# Altium PCB indicator.PcbDoc
Units mm, origin at the board's own origin, x right, y up, seen from the top; angles counter-clockwise.
Board outline 152.4 x 101.6 mm, 2 copper layers (Top Layer, Bottom Layer); 23 components, 34 nets, 114 pads, 0 vias.
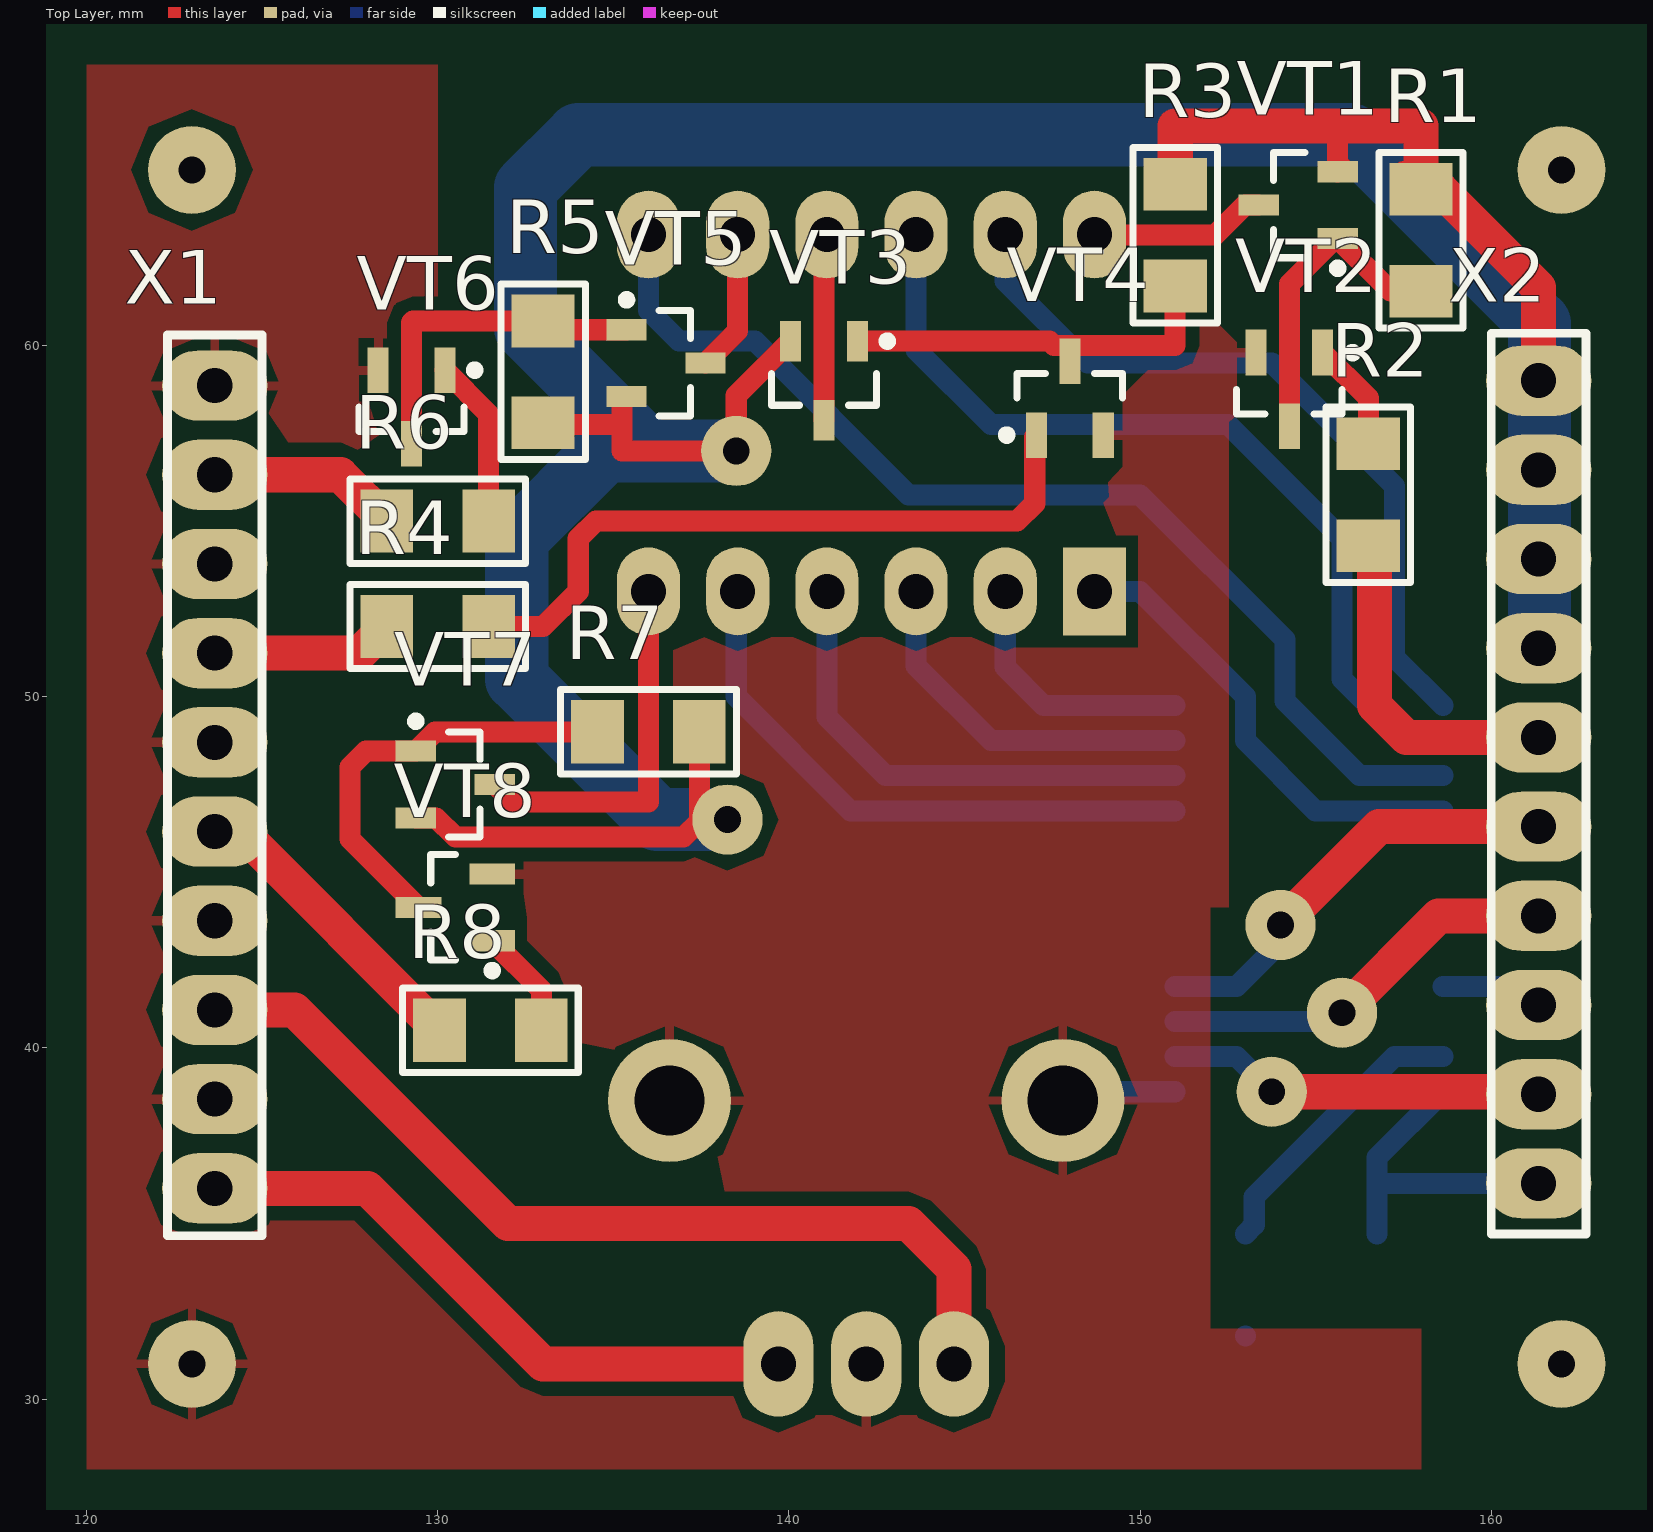
[diagram p0: Top Layer view]
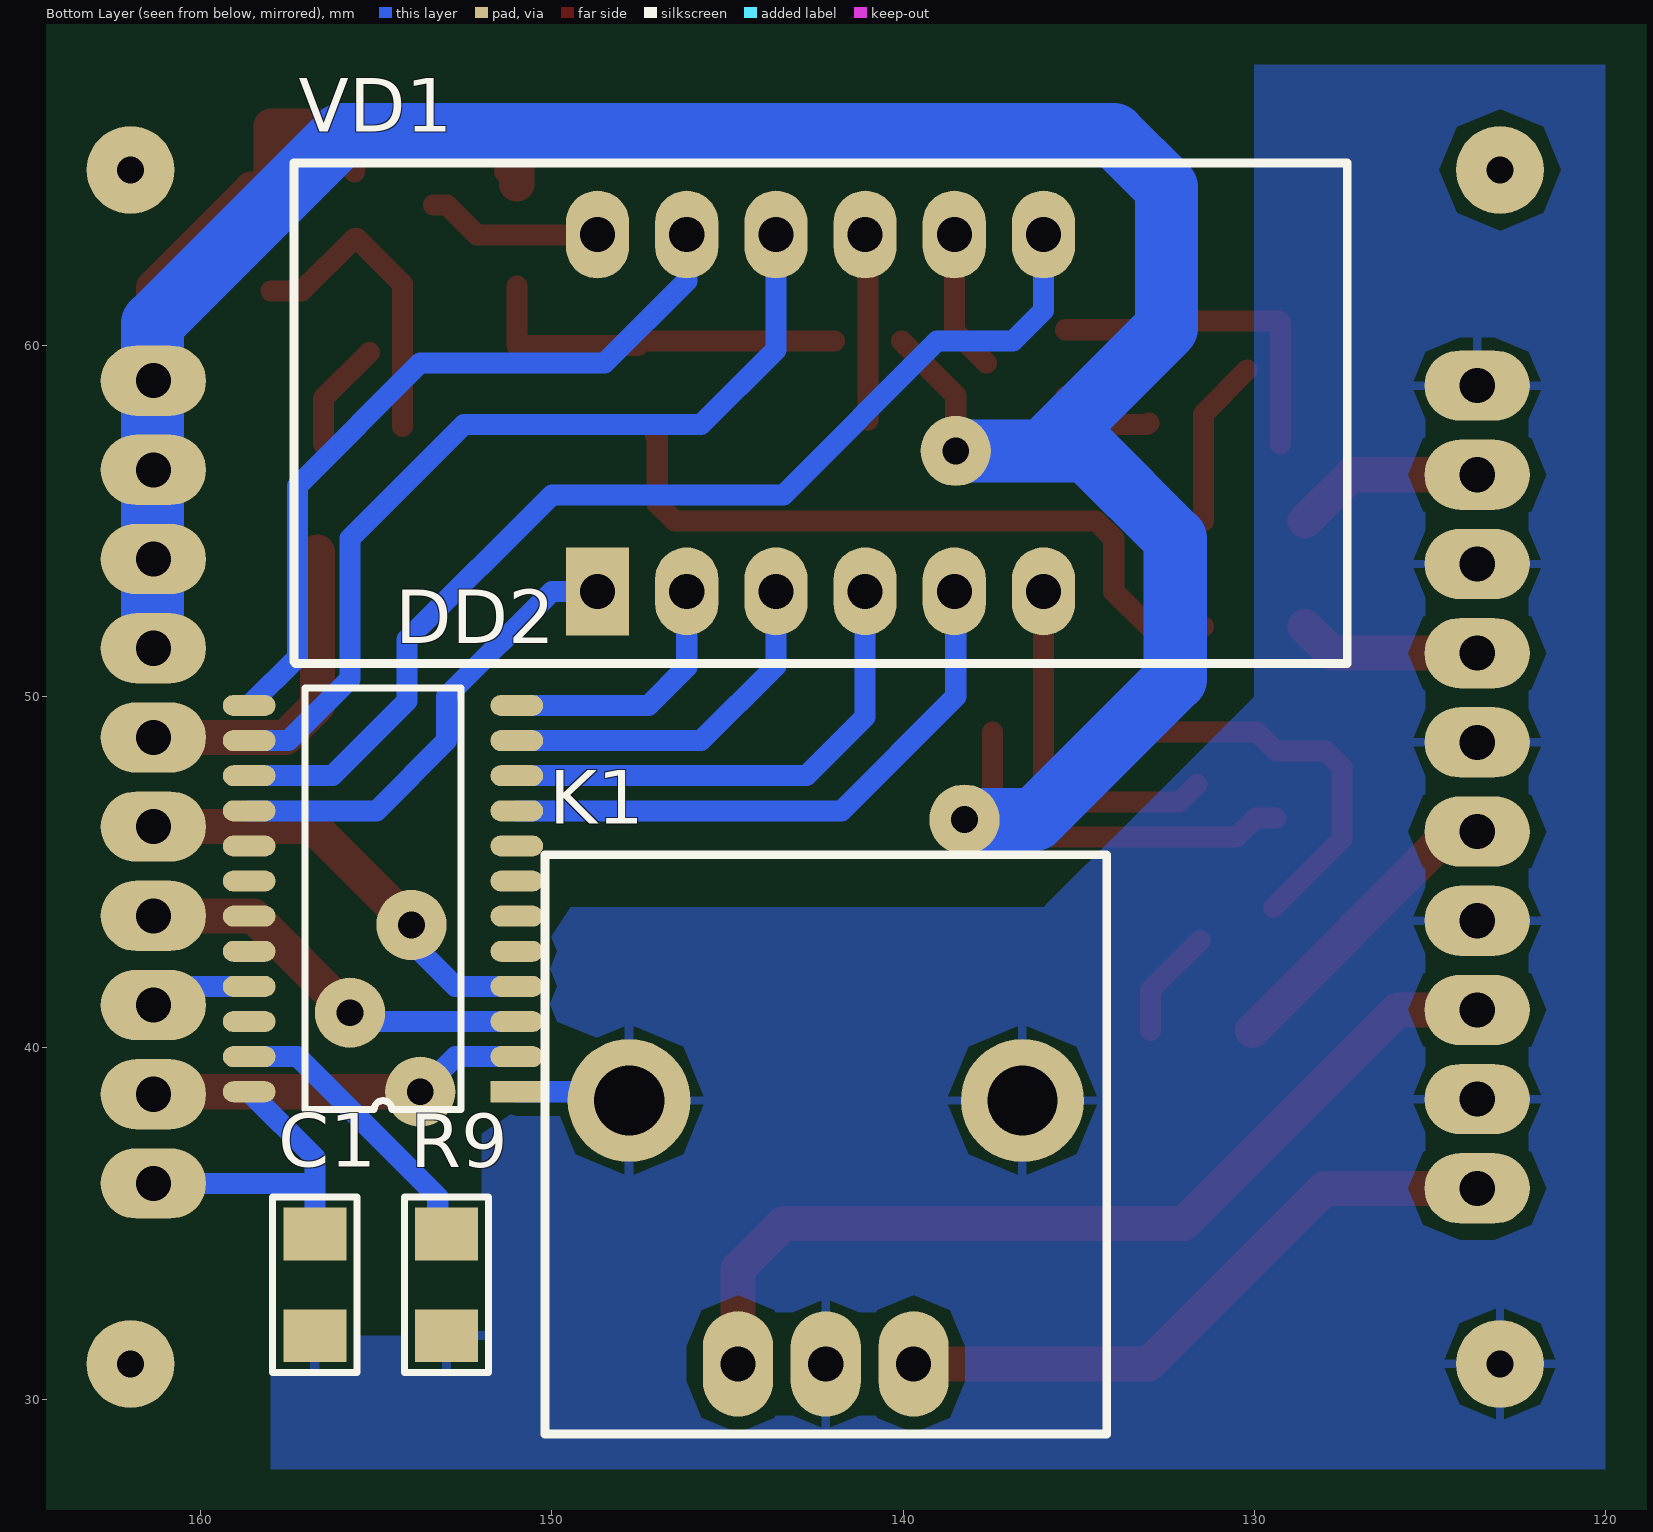
[diagram p1: Bottom Layer view, seen from below]

## Layer stack, top to bottom
Top Solder: solder mask 0.0102, Solder Resist, Dk 3.5
Top Layer: signal copper 0.0356
Dielectric 1: dielectric 0.32, FR-4, Dk 4.8
Bottom Layer: signal copper 0.0356
Bottom Solder: solder mask 0.0102, Solder Resist, Dk 3.5

## Board outline
25.4,25.4 177.8,25.4 177.8,127 25.4,127

## Design rules (kind name [scope] priority, off if disabled: settings)
Clearance [All] p1: gap=0.35
PolygonConnect [All] p1: connectstyle=Relief reliefconductorwidth=0.254 reliefentries=4 polygonreliefangle="90 Angle" airgapwidth=0.254
RoomDefinition indicator [InComponentClass('indicator')] p1: confinementstyle=ConfineIn formatcopy=TRUE lockcomponents=FALSE outline 165,28 165,68 120,68 120,28
RoutingVias [All] p1: holewidth=0.711 width=1.27 viastyle="Through Hole" minholewidth=0.711 minwidth=1.27 maxholewidth=0.711 maxwidth=1.27
SolderMaskExpansion [All] p1: expansion=0.102
Width [All] p1: maxlimit=11 minlimit=0.254 preferedwidth=0.254
29 further rules are at their usual default settings.

## Components (designator, comment, footprint, x,y, rotation, side; value= is the part's Value field where it differs from the comment)
C1 "0.1 uF" R1206 156.75,33.25 r270 bottom
DD2 "MBI5026CF" SOP24 151,38.75 r0 bottom
K1 "EC12" EC12E1220406 144.7,31 r90 bottom
R1 "1K" R1206 158,63 r90 top
R2 "1K" R1206 156.5,55.75 r270 top
R3 "1K" R1206 151,63.146 r90 top
R4 "1K" R1206 130,52 r180 top
R5 "1K" R1206 133,59.25 r270 top
R6 "1K" R1206 130,55 r180 top
R7 "1K" R1206 136,49 r0 top
R8 "1K" R1206 131.5,40.5 r180 top
R9 "4.7K" R1206 153,33.25 r90 bottom
VD1 "3461BS" 3461bs 148.7,53 r90 bottom
VT1 "IRLML6302" SOT-23_N 154.5,64 r180 top
VT2 "BC847" SOT23_N 154.25,58.75 r270 top
VT3 "IRLML6302" SOT-23_N 141,59 r270 top
VT4 "BC847" SOT23_N 148,58.5 r90 top
VT5 "IRLML6302" SOT-23_N 136.5,59.5 r0 top
VT6 "BC847" SOT23_N 129.25,58.25 r270 top
VT7 "IRLML6302" SOT-23_N 130.5,47.5 r0 top
VT8 "BC847" SOT23_N 130.5,44 r180 top
X1 "PBS-10" PBS-10 125,36 r180 top
X2 "PBS-10" PBS-10 160,59 r0 top

## Footprints (in the part's own frame and the unit in brackets; to place one, negate y for a bottom-side part, rotate by r counter-clockwise, add the part's x,y. Pads: shape width x height; smd on the part's side, far side on the other; paste and mask are expansions set on the pad)
3461bs [mm]
  rect 2.5x1.8 hole 1: 1(0,0)
  oval 2.5x1.8 hole 1: 2(0,-2.54) 3(0,-5.08) 4(0,-7.62) 5(0,-10.16) 6(0,-12.7) 7(10.16,-12.7) 8(10.16,-10.16) 9(10.16,-7.62) 10(10.16,-5.08) 11(10.16,-2.54) 12(10.16,0)
  silkscreen extent -2.05,-21.35 12.2,8.65, body extent -1.9,-21.45 12.1,8.55, height 7.2
EC12E1220406 [mm]
  oval 3x2 hole 1: 1(0,0) 2(0,-2.5) 3(0,-5)
  round 3.5 hole 2: 2(7.5,-8.1) 5(7.5,3.1)
  silkscreen extent -2,-10.5 14.5,5.5, body extent -0.15,-9.5 14.1,4.5, height 20.2
PBS-10 [mm]
  oval 3x2 hole 1: 1(1.35,0) 2(1.35,-2.54) 3(1.35,-5.08) 4(1.35,-7.62) 5(1.35,-10.16) 6(1.35,-12.7) 7(1.35,-15.24) 8(1.35,-17.78) 9(1.35,-20.32) 10(1.35,-22.86)
  silkscreen extent 0,-24.3 2.7,1.35, body extent 0,-24.3 2.7,1.35, height 12
R1206 [mm]
  rect 1.5x1.8 smd: 1(-1.45,0) 2(1.45,0)
  silkscreen extent -2.5,-1.2 2.5,1.2, body extent -1.6,-0.85 1.6,0.85, height 0.6
SOP24 [mm]
  rect 1.5x0.6 smd: 1(0,0)
  oval 1.5x0.6 smd: 2(0,-1) 3(0,-2) 4(0,-3) 5(0,-4) 6(0,-5) 7(0,-6) 8(0,-7) 9(0,-8) 10(0,-9) 11(0,-10) 12(0,-11) 13(7.62,-11) 14(7.62,-10) 15(7.62,-9) 16(7.62,-8) 17(7.62,-7) 18(7.62,-6) 19(7.62,-5) 20(7.62,-4) 21(7.62,-3) 22(7.62,-2) 23(7.62,-1) 24(7.62,0)
  silkscreen extent 1.59,-11.5 6.03,0.5, body extent 0.75,-12 6.85,1, height 1.9
SOT23_N [mm] "SOT23, 3-Leads, Body 2.9x1.3mm, Pitch 0.95mm, Lead Span 2.3mm, IPC Medium Density"
  rect 1.3x0.6 smd: 1(-1.05,0.95) 2(-1.05,-0.95) 3(1.05,0)
  silkscreen extent -1.17,-1.5 0.7,1.93, body extent -0.7,-1.5 0.7,1.5, height 1.1
SOT-23_N [mm] "SOT23, 3-Leads, Body 2.9x1.3mm, Pitch 0.95mm, Lead Span 2.3mm, IPC Medium Density"
  rect 1.15x0.6 smd: 1(-1.125,0.95) 2(-1.125,-0.95) 3(1.125,0)
  silkscreen extent -1.25,-1.5 0.7,1.92, body extent -0.7,-1.5 0.7,1.5, height 1.11

## Part data
C1: library part CAP_1206
K1: library part EC12E1220406
R1 R2 R3 R4 R5 R6 R7 R8 R9: library part Res
VT1 VT3 VT5 VT7: "HEXFET Power MOSFET"
VT2 VT4 VT6 VT8: "NPN General-purpose Transistor"

## Free pads (board coordinates)
  round 2 hole 0.762: 0(138.5,57) 1(138.25,46.5) 3(155.75,41) 5(153.75,38.75) 6(154,43.5)
  round 2.5 hole 0.762: 3(123,31) 3(123,65) 3(162,31) 3(162,65)

## Nets (pads, with @x,y where several pads share a name; then routed paths per layer and width w, separated by ;. In a path a pad name is that pad's centre, name@x,y a point inside that pad or via, vN(x,y) a via of type N, cw(c..) or ccw(c..) an arc to the next point about the centre after c; other vN are vias at no path point)
5V: C1.1 DD2.24 X2.10 | length 9.5
  Bottom Layer w0.6: C1.1 156.75,36 ; DD2.24 156.75,36.88 156.75,36 ; X2.10 156.89,36.14 156.75,36
12V: pad.0 pad.1 R1.2 R3.2 R5.2 R7.2 VT1.2 VT3.2 VT5.2 VT7.2 X2.1 X2.2 X2.3 X2.4 | length 111
  Top Layer w0.6: VT7.2 129.95,46.55 130.5,46 137,46 137.45,46.45 R7.2 ; R5.2 133.05,57.75 135.25,57.75 ; VT5.2 135.25,58.425 135.25,57.75 ; VT3.2 138.5,58.575 pad.0 135.25,57 135.25,57.75 ; R3.2 R3.2@151.354,64.95 ; 155.625,66.125 VT1.2 VT1.2@155.75,65.075 ; R1.2@157.5,64.95 R1.2
  Top Layer w1: R3.2 151,66.25 158,66.25 R1.2 158.55,64.45 161.35,61.65 X2.1
  Bottom Layer w1.8: pad.1 136.25,46.5 132.25,50.5 132.25,54.5 134.75,57 136,57 ; pad.0 136,57 ; X2.4 161.37,51.38 161.37,60.63 ; 161.35,60.65 156,66 134,66 132.5,64.5 132.5,60.5 136,57
A: DD2.13 VD1.11 | length 21.6
  Bottom Layer w0.6: VD1.11 146.16,61.84 148.5,59.5 153.75,59.5 157.25,56 157.25,51.12 DD2.13
A1: VD1.12 VT1.3 | length 5
  Top Layer w0.6: VD1.12 148.714,63.146 152.129,63.146 152.983,64 VT1.3
A2: VD1.9 VT3.3 | length 5.2
  Top Layer w0.6: VT3.3 VD1.9@141,63.08
A3: VD1.8 VT5.3 | length 4
  Top Layer w0.6: VT5.3 138.54,60.415 VD1.8
A4: VD1.6 VT7.3 | length 11.7
  Top Layer w0.6: VT7.3 132.125,47 136,47 VD1.6 VD1.6@136,51.875
B: DD2.15 VD1.7 | length 31.3
  Bottom Layer w0.6: VD1.7 136,61 136.875,60.125 139.035,60.125 143.41,55.75 150,55.75 154.125,51.625 154.125,49.875 156.25,47.75 DD2.15
C: DD2.10 VD1.4 | length 14.2
  Bottom Layer w0.6: VD1.4 141.08,49.42 142.75,47.75 DD2.10
CLK: DD2.3 pad.3@155.75,41 X2.7 | length 11.6
  Top Layer w0.6: X2.7@161.34,43.75 X2.7
  Top Layer w1: pad.3@155.75,41 158.5,43.75 X2.7@161.34,43.75
  Bottom Layer w0.6: DD2.3 155.5,40.75 pad.3@155.75,41
D: DD2.12 VD1.2 | length 7.5
  Bottom Layer w0.6: VD1.2 146.16,50.84 147.25,49.75 DD2.12
E: DD2.16 VD1.1 | length 13.2
  Bottom Layer w0.6: VD1.1 150,53 153,50 153,48.75 155,46.75 DD2.16
ENC_A: K1.1 X1.3 | length 26.8
  Top Layer w1: X1.3 125.92,41.08 132,35 143.4,35 144.7,33.7 K1.1
ENC_B: K1.3 X1.1 | length 18.1
  Top Layer w1: X1.1 128,36 133,31 K1.3
F: DD2.14 VD1.10 | length 25.2
  Bottom Layer w0.6: VD1.10 143.62,59.88 145.75,57.75 152.5,57.75 155.75,54.5 155.75,50.5 157.5,48.75 DD2.14
G: DD2.9 VD1.5 | length 16.8
  Bottom Layer w0.6: VD1.5@138.5,52.96 138.5,50 141.75,46.75 DD2.9
GND: C1.2 DD2.1 K1.2 K1.5 pad.3@123,31 R9.1 VT2.2 VT4.2 VT6.2 VT8.2 X1.2 X1.4 X1.6 X1.8 X1.10 | length 4.1
  Top Layer w0.6: X1.10 X1.10@124.09,59.3
  Bottom Layer w0.6: X1.2 X1.2@123.69,38.5 ; K1.5 148.05,38.75 DD2.1
  Bottom Layer w1: K1.5@147.75,38.45 K1.5
H: DD2.11 VD1.3 | length 10.4
  Bottom Layer w0.6: VD1.3 143.62,50.88 145.75,48.75 DD2.11
LE: DD2.4 pad.6 X2.6 | length 12.5
  Top Layer w1: pad.6 156.8,46.3 X2.6
  Bottom Layer w0.6: DD2.4 152.75,41.75 154,43 pad.6
NetDD2_23: DD2.23 R9.2 | length 8.2
  Bottom Layer w0.6: R9.2 153.25,34.95 153.25,35.75 157.25,39.75 DD2.23
NetR1_1: R1.1 VT1.1 VT2.3 | length 9
  Top Layer w0.6: VT2.3 154.25,61.75 155.55,63.05 VT1.1 157.125,61.55 R1.1
NetR2_1: R2.1 VT2.1 | length 3.1
  Top Layer w0.6: VT2.1 156.5,58.5 R2.1
NetR3_1: R3.1 VT3.1 VT4.3 | length 10.8
  Top Layer w0.6: VT3.1 147.425,60.125 147.55,60 151,60 R3.1
NetR4_1: R4.1 VT4.1 | length 19.8
  Top Layer w0.6: R4.1 133,52 134,53 134,54.5 134.5,55 146.5,55 147,55.5 147,57.4 VT4.1
NetR5_1: R5.1 VT5.1 VT6.3 | length 9.6
  Top Layer w0.6: VT6.3 129.25,60.65 ; 129.3,60.7 R5.1 133.25,60.45 VT5.1
NetR6_1: R6.1 VT6.1 | length 4.8
  Top Layer w0.6: VT6.1 131.45,58.05 R6.1
NetR7_1: R7.1 VT7.1 VT8.3 | length 12.3
  Top Layer w0.6: VT8.3 127.5,45.95 127.5,48 127.95,48.45 VT7.1 129.925,49 R7.1
NetR8_1: R8.1 VT8.1 | length 3.1
  Top Layer w0.6: VT8.1 132.95,41.65 R8.1
OE: DD2.21 X2.8 | length 2.9
  Bottom Layer w0.6: DD2.21 160.82,41.75 X2.8
R1: R2.2 X2.5 | length 9.5
  Top Layer w0.6: X2.5@161.26,48.75 X2.5
  Top Layer w1: R2.2@156.68,54.12 156.68,49.75 157.59,48.84 X2.5
R2: R4.2 X1.7 | length 5.2
  Top Layer w1: X1.7 127.79,51.24 R4.2
R3: R6.2 X1.9 | length 5.4
  Top Layer w1: X1.9 127.23,56.32 R6.2
R4: R8.2 X1.5 | length 8.7
  Top Layer w1: X1.5 124.39,46.16 R8.2
SDI: DD2.2 pad.5 X2.9 | length 10.8
  Top Layer w1: pad.5 161.28,38.75 X2.9
  Bottom Layer w0.6: DD2.2 152.75,39.75 pad.5
pads on no net: DD2.5 DD2.6 DD2.7 DD2.8 DD2.17 DD2.18 DD2.19 DD2.20 DD2.22

## Polygon pours and split planes (outlines as drawn)
GND on Bottom Layer "Bottom Layer-No Net" (solid, pour order 9): 133.84,42 138,42 133.84,46.16
GND on Bottom Layer "Top Layer-No Net" (solid, pour order 7): 120,28 158,28 158,32 157.8,31.8 152,31.8 152,44 135,44 135,45 130,50 130,68 120,68
GND on Top Layer "Top Layer-No Net" (solid, pour order 9): 120,28 158,28 158,32 152,32 152,38 152,44 135,44 135,45 130,50 130,68 120,68
GND on Top Layer "Top Layer-No Net" (solid, pour order 11): 133.223,44 152.524,44 152.524,57.813 154,59.194 154,60.788 149.345,60.788 149.118,61 149.061,60.947 149.061,58.291 149.061,55.741 149.118,55.687 146.847,53.562 145.893,53.562 127.546,53.562 127.546,53.563 127.546,51.437